# EAGLE board CT_schematic (EAGLE 7.6.0)

Size 100 x 80 mm. Coordinates in mm from the lower left corner, seen from the top.
Outline: 0,0 100,0 100,80 0,80 0,0
Copper layers (1*16): Top 0.035mm / dielectric 1.5mm / Bottom 0.035mm
Design rules "default": minimum track width 10mil, minimum drill 24mil, track to track 8mil, track to pad 8mil, pad to pad 8mil, via to via 8mil, smd to smd 8mil, copper to edge 40mil, drill to drill 8mil, minimum pad ring 10mil, minimum via ring 8mil, stop-mask expansion 4mil, vias tented up to drill 0mil, thermal gap 10mil

## Footprints (pad centres in the part's own frame; a part is rotated, then mirrored left to right if it is on the bottom)
C0603 = smd 0.8 x 0.8: 1 -0.762,0; 2 0.762,0
C0402 = smd 0.5 x 0.5: 1 -0.508,0; 2 0.508,0
C0805 = smd 1.2 x 1.3: 1 -1.016,0; 2 1.016,0
C1206 = smd 1.3 x 1.6: 1 -1.524,0; 2 1.524,0
DR1040 = smd 1.6 x 3.2: 1 -4.458,0; 2 4.458,0
R0603 = smd 0.8 x 0.8: 1 -0.762,0; 2 0.762,0
LQFP144 = smd 0.35 x 1.35: 1 -8.75,-10.625; 2 -8.25,-10.625; 3 -7.75,-10.625; 4 -7.25,-10.625; 5 -6.75,-10.625; 6 -6.25,-10.625; 7 -5.75,-10.625; 8 -5.25,-10.625; 9 -4.75,-10.625; 10 -4.25,-10.625; 11 -3.75,-10.625; 12 -3.25,-10.625; 13 -2.75,-10.62; 14 -2.25,-10.625; 15 -1.75,-10.625; 16 -1.25,-10.625; 17 -0.75,-10.625; 18 -0.25,-10.625; 19 0.25,-10.625; 20 0.75,-10.625; 21 1.25,-10.625; 22 1.75,-10.625; 23 2.25,-10.625; 24 2.75,-10.62; 25 3.25,-10.625; 26 3.75,-10.625; 27 4.25,-10.625; 28 4.75,-10.625; 29 5.25,-10.625; 30 5.75,-10.625; 31 6.25,-10.625; 32 6.75,-10.625; 33 7.25,-10.625; 34 7.75,-10.625; 35 8.25,-10.625; 36 8.75,-10.625; 73 8.75,10.625; 74 8.25,10.625; 75 7.75,10.625; 76 7.25,10.625; 77 6.75,10.625; 78 6.25,10.625; 79 5.75,10.625; 80 5.25,10.625; 81 4.75,10.625; 82 4.25,10.625; 83 3.75,10.625; 84 3.25,10.625; 85 2.75,10.625; 86 2.25,10.625; 87 1.75,10.625; 88 1.25,10.625; 89 0.75,10.625; 90 0.25,10.625; 91 -0.25,10.625; 92 -0.75,10.625; 93 -1.25,10.625; 94 -1.75,10.625; 95 -2.25,10.625; 96 -2.75,10.625; 97 -3.25,10.625; 98 -3.75,10.625; 99 -4.25,10.625; 100 -4.75,10.625; 101 -5.25,10.625; 102 -5.75,10.625; 103 -6.25,10.625; 104 -6.75,10.625; 105 -7.25,10.625; 106 -7.75,10.625; 107 -8.25,10.625; 108 -8.75,10.625 | smd 1.35 x 0.35: 37 10.625,-8.75; 38 10.625,-8.25; 39 10.625,-7.75; 40 10.625,-7.25; 41 10.625,-6.75; 42 10.625,-6.25; 43 10.625,-5.75; 44 10.625,-5.25; 45 10.625,-4.75; 46 10.625,-4.25; 47 10.625,-3.75; 48 10.625,-3.25; 49 10.625,-2.75; 50 10.625,-2.25; 51 10.625,-1.75; 52 10.625,-1.25; 53 10.625,-0.75; 54 10.625,-0.25; 55 10.625,0.25; 56 10.625,0.75; 57 10.625,1.25; 58 10.625,1.75; 59 10.625,2.25; 60 10.625,2.75; 61 10.625,3.25; 62 10.625,3.75; 63 10.625,4.25; 64 10.625,4.75; 65 10.625,5.25; 66 10.625,5.75; 67 10.625,6.25; 68 10.625,6.75; 69 10.625,7.25; 70 10.625,7.75; 71 10.625,8.25; 72 10.625,8.75; 109 -10.625,8.75; 110 -10.625,8.25; 111 -10.625,7.75; 112 -10.625,7.25; 113 -10.625,6.75; 114 -10.625,6.25; 115 -10.625,5.75; 116 -10.625,5.25; 117 -10.625,4.75; 118 -10.625,4.25; 119 -10.625,3.75; 120 -10.625,3.25; 121 -10.625,2.75; 122 -10.625,2.25; 123 -10.625,1.75; 124 -10.625,1.25; 125 -10.625,0.75; 126 -10.625,0.25; 127 -10.625,-0.25; 128 -10.625,-0.75; 129 -10.625,-1.25; 130 -10.625,-1.75; 131 -10.625,-2.25; 132 -10.625,-2.75; 133 -10.625,-3.25; 134 -10.625,-3.75; 135 -10.625,-4.25; 136 -10.625,-4.75; 137 -10.625,-5.25; 138 -10.625,-5.75; 139 -10.625,-6.25; 140 -10.625,-6.75; 141 -10.625,-7.25; 142 -10.625,-7.75; 143 -10.625,-8.25; 144 -10.625,-8.75
LGA-14 = smd 0.675 x 0.25: 1 -1.262,0.75; 2 -1.262,0.25; 3 -1.262,-0.25; 4 -1.262,-0.75; 8 1.262,-0.75; 9 1.262,-0.25; 10 1.262,0.25; 11 1.262,0.75 | smd 0.25 x 0.675: 5 -0.5,-1.012; 6 0,-1.012; 7 0.5,-1.012; 12 0.5,1.012; 13 0,1.012; 14 -0.5,1.012
TST-110-05-T-D-RA = drill 1 pad 1.7 square: 1 0,0 | drill 1 pad 1.7: 2 0,2.54; 3 2.54,0; 4 2.54,2.54; 5 5.08,0; 6 5.08,2.54; 7 7.62,0; 8 7.62,2.54; 9 10.16,0; 10 10.16,2.54; 11 12.7,0; 12 12.7,2.54; 13 15.24,0; 14 15.24,2.54; 15 17.78,0; 16 17.78,2.54; 17 20.32,0; 18 20.32,2.54; 19 22.86,0; 20 22.86,2.54
DFN8-S = smd 0.6 x 0.4: 1 -2.69,1.905; 2 -2.69,0.635; 3 -2.69,-0.635; 4 -2.69,-1.905; 5 2.69,-1.905; 6 2.69,-0.635; 7 2.69,0.635; 8 2.69,1.905
FCI_10118193-0001LF = smd 0.4 x 1.35: 1 -1.3,2.675; 2 -0.65,2.675; 3 0,2.675; 4 0.65,2.675; 5 1.3,2.675 | smd 1.6 x 1.4: 6 -3.2,2.45; 7 3.2,2.45 | smd 1.9 x 1.9: 8 -1.2,0; 9 1.2,0 | hole 0.5: -3.3,0; 3.3,0
SOT143B = smd 1 x 0.7: 1 -0.75,-1 | smd 0.6 x 0.7: 2 0.95,-1; 3 0.95,1; 4 -0.95,1
ASEK = smd 1.4 x 1: 1 -1.1,-0.8; 2 1.1,-0.8; 3 1.1,0.8; 4 -1.1,0.8
ASFL1 = smd 1.7 x 1.5: 1 -1.27,-1.1; 2 1.27,-1.1; 3 1.27,1.1; 4 -1.27,1.1
TSOT-23-5 = smd 1.3 x 0.62: 1 -1.31,0.95; 2 -1.31,0; 3 -1.31,-0.95; 4 1.31,-0.95; 5 1.31,0.95
DFN8_2X3MC = smd 0.813 x 0.305: 1 -1.398,0.75; 2 -1.398,0.25; 3 -1.398,-0.25; 4 -1.398,-0.75; 5 1.398,-0.75; 6 1.398,-0.25; 7 1.398,0.25; 8 1.398,0.75 | smd 1.753 x 1.549: 9 0,0
JST-2-SMD = smd 1 x 4.6: 1 -1,-3.7; 2 1,-3.7 | smd 1.6 x 3.4: NC1 -3.4,1.5; NC2 3.4,1.5
SON-6 = smd 0.55 x 0.3: 1 -0.355,0.5 | smd 0.52 x 0.3: 2 -0.37,0; 3 -0.37,-0.5; 4 0.37,-0.5; 5 0.37,0; 6 0.37,0.5
SW_4-1437565-2 = smd 1.4 x 2.1: 1 -2.23,4.55; 2 -2.23,-4.55; 3 2.23,4.55; 4 2.23,-4.55
LGM67K-G1J2-24-Z = smd 0.8 x 1.4: A -2,0; C 0,0
NC7SZ125M5X = smd 1.3 x 0.7: 1 -1.3,0.95; 2 -1.3,0; 3 -1.3,-0.95; 4 1.3,-0.95; 5 1.3,0.95
DUMMY_PACKAGE_165 = drill 0.3: 1 0,-1; 2 1.5,-1; 3 3,-1

## Placement (x,y rotation side)
C1  1e-07  [C0603]  -58.42,57.15 0 top  (outside the outline)
C2  1e-07  [C0603]  -62.23,57.15 0 top  (outside the outline)
C3  1e-07  [C0603]  -66.04,57.15 0 top  (outside the outline)
C4  1e-07  [C0603]  -15.24,62.23 0 top  (outside the outline)
C5  1e-07  [C0603]  -19.05,62.23 0 top  (outside the outline)
C6  1e-07  [C0603]  -22.86,62.23 0 top  (outside the outline)
C7  1e-07  [C0603]  -26.67,62.23 0 top  (outside the outline)
C8  1e-07  [C0603]  -30.48,62.23 0 top  (outside the outline)
C9  1e-07  [C0603]  -34.29,62.23 0 top  (outside the outline)
C10  1e-07  [C0603]  -38.1,62.23 0 top  (outside the outline)
C11  1e-07  [C0603]  -41.91,62.23 0 top  (outside the outline)
C12  4.7e-06  [C0603]  -54.61,57.15 0 top  (outside the outline)
C13  1e-07  [C0603]  -45.72,62.23 0 top  (outside the outline)
C14  1e-08  [C0603]  -49.53,62.23 0 top  (outside the outline)
C15  1e-06  [C0603]  -53.34,62.23 0 top  (outside the outline)
C16  1e-07  [C0402]  -30.48,67.31 0 top  (outside the outline)
C17  1e-07  [C0402]  -34.29,67.31 0 top  (outside the outline)
C18  1e-07  [C0402]  -38.1,67.31 0 top  (outside the outline)
C19  1e-07  [C0402]  -41.91,67.31 0 top  (outside the outline)
C20  1e-08  [C0402]  -45.72,67.31 0 top  (outside the outline)
C21  1e-08  [C0402]  -49.53,67.31 0 top  (outside the outline)
C22  1e-08  [C0402]  -53.34,67.31 0 top  (outside the outline)
C23  1e-05  [C0805]  -60.96,44.45 0 top  (outside the outline)
C24  1e-05  [C0805]  -66.04,44.45 0 top  (outside the outline)
C25  1e-07  [C0402]  -57.15,67.31 0 top  (outside the outline)
C26  1e-05  [C1206]  -36.83,44.45 0 top  (outside the outline)
C27  1e-05  [C1206]  -43.18,44.45 0 top  (outside the outline)
C28  1e-08  [C0402]  -60.96,67.31 0 top  (outside the outline)
C29  1e-08  [C0402]  -64.77,67.31 0 top  (outside the outline)
I1  3.8e-06  [DR1040]  -60.96,6.35 0 top  (outside the outline)
R2  1000.0  [R0603]  -57.15,62.23 0 top  (outside the outline)
R4  4700.0  [R0603]  -60.96,62.23 0 top  (outside the outline)
R5  2200.0  [R0603]  -64.77,62.23 0 top  (outside the outline)
R6  2200.0  [R0603]  -68.58,62.23 0 top  (outside the outline)
R7  2200.0  [R0603]  -15.24,67.31 0 top  (outside the outline)
R8  2200.0  [R0603]  -19.05,67.31 0 top  (outside the outline)
R9  10000.0  [R0603]  -43.18,52.07 0 top  (outside the outline)
R10  10000.0  [R0603]  -48.26,52.07 0 top  (outside the outline)
R11  10000.0  [R0603]  -53.34,52.07 0 top  (outside the outline)
R12  10000.0  [R0603]  -58.42,52.07 0 top  (outside the outline)
R13  10000.0  [R0603]  -63.5,52.07 0 top  (outside the outline)
R14  10000.0  [R0603]  -68.58,52.07 0 top  (outside the outline)
R15  10000.0  [R0603]  -15.24,57.15 0 top  (outside the outline)
R16  10000.0  [R0603]  -20.32,57.15 0 top  (outside the outline)
R17  10000.0  [R0603]  -25.4,57.15 0 top  (outside the outline)
R18  10000.0  [R0603]  -30.48,57.15 0 top  (outside the outline)
R19  10000.0  [R0603]  -35.56,57.15 0 top  (outside the outline)
R20  220000.0  [R0603]  -27.94,52.07 0 top  (outside the outline)
R21  1000000.0  [R0603]  -22.86,52.07 0 top  (outside the outline)
R22  10000.0  [R0603]  -40.64,57.15 0 top  (outside the outline)
R23  10000.0  [R0603]  -45.72,57.15 0 top  (outside the outline)
R24  9100.0  [R0603]  -22.86,67.31 0 top  (outside the outline)
R25  680000.0  [R0603]  -33.02,52.07 0 top  (outside the outline)
R26  120000.0  [R0603]  -38.1,52.07 0 top  (outside the outline)
R27  2000.0  [R0603]  -26.67,67.31 0 top  (outside the outline)
R28  10000.0  [R0603]  -50.8,57.15 0 top  (outside the outline)
U1  STM32L162ZET6  [LQFP144]  -24.13,11.43 0 top  (outside the outline)
U2  BMG250  [LGA-14]  -17.78,45.72 0 top  (outside the outline)
U3  TST-110-05-T-D-RA  [TST-110-05-T-D-RA]  -46.99,35.56 0 top  (outside the outline)
U4  24AA512-I/MF  [DFN8-S]  -38.1,27.94 0 top  (outside the outline)
U5  10118193-0001LF  [FCI_10118193-0001LF]  -63.5,26.67 0 top  (outside the outline)
U6  prtr5v0u2ax  [SOT143B]  -24.13,72.39 0 top  (outside the outline)
U7  ASEK-32.768KHz-ECST  [ASEK]  -66.04,38.1 0 top  (outside the outline)
U8  ASFL1-25MHZ-NCS  [ASFL1]  -54.61,27.94 0 top  (outside the outline)
U9  ltc3406es5  [TSOT-23-5]  -15.24,50.8 0 top  (outside the outline)
U10  MCP73831T-2ACI/MC  [DFN8_2X3MC]  -39.37,71.12 0 top  (outside the outline)
U11  S2B-PH-SM4-TB(LF)(SN)  [JST-2-SMD]  -22.86,29.21 0 top  (outside the outline)
U12  TPS3895ADRYR  [SON-6]  -33.02,71.12 0 top  (outside the outline)
U13  4-1437565-2  [SW_4-1437565-2]  -50.8,6.35 0 top  (outside the outline)
U14  Q65110A2395  [LGM67K-G1J2-24-Z]  -25.4,45.72 0 top  (outside the outline)
U15  nc7sz125m5x  [NC7SZ125M5X]  -48.26,44.45 0 top  (outside the outline)
U16  nc7sz125m5x  [NC7SZ125M5X]  -54.61,44.45 0 top  (outside the outline)
U17  Dummy  [DUMMY_PACKAGE_165]  -30.48,72.39 0 top  (outside the outline)

## Library data of the parts
C1-C29 I1 R2 R4-R28 U1-U17 = circuit_tree

## Nets
CLK_U1_8: U1.8 U7.3
CLK_U1_23: U1.23 U8.3
GND: C1.2 C2.2 C3.2 C4.2 C5.2 C6.2 C7.2 C8.2 C9.2 C10.2 C11.2 C12.2 C13.2 C14.2 C15.2 C16.2 C17.2 C18.2 C19.2 C20.2 C21.2 C22.2 C23.2 C24.1 C24.2 C25.2 C26.2 C27.2 C28.2 C29.2 R2.2 R9.2 R16.2 R20.2 R24.2 R26.2 R27.2 U1.16 U1.30 U1.31 U1.38 U1.51 U1.61 U1.71 U1.83 U1.94 U1.107 U1.120 U1.130 U1.143 U2.1 U2.6 U2.7 U3.4 U3.6 U3.8 U3.10 U3.12 U3.14 U3.16 U3.18 U3.20 U4.4 U4.7 U5.5 U5.6 U5.7 U5.8 U5.9 U6.1 U7.2 U8.2 U9.2 U10.6 U10.9 U11.2 U12.2 U14.C U15.2 U15.3 U16.1 U16.3 U17.1
INPUT_USBPOWER_5V: C26.1 R28.2 U5.1 U6.4 U10.1 U10.2
NET_U1_6: C13.1 U1.6
NET_U1_25: R4.1 U1.25 U16.4
NET_U1_33: U1.32 U1.33
NET_U1_69: R7.1 U1.69 U4.6
NET_U1_70: R8.1 U1.70 U4.5
NET_U1_136: R5.1 U1.136 U2.13
NET_U1_137: R6.1 U1.137 U2.14
NET_U1_138: R9.1 U1.138
NET_U1_141: U14.A
NET_U1_142: U13.3 U13.4
NET_U2_12: R10.1 U2.12
NET_U3_19: R16.1 U3.19
NET_U4_1: R17.1 U4.1
NET_U4_2: R18.1 U4.2
NET_U4_3: R19.1 U4.3
NET_U9_1: U9.1
NET_U9_3: I1.1 U9.3
NET_U9_5: R20.1 R21.1 U9.5
NET_U9_ATNET_3: I1.2 R21.2
NET_U10_5: R28.1 U10.5
NET_U10_8: R27.1 U10.8
NET_U12_1: R23.1 R24.1 U12.1
NET_U12_3: R25.2 R26.1 U12.3
NET_U12_4: R22.1 U12.4 U15.4 U16.2
NET_U13_1: R2.1 U13.1 U13.2
PROC_ADC_IN2B: U1.50 U17.2
PROC_ADC_IN20: U1.75 U17.3
PROC_GPIO_TO_U2_INT1: U1.1 U2.4
PROC_SYS_JTCK_SWCLK: R14.1 U1.109 U3.9
PROC_SYS_JTDI: R12.1 U1.110 U3.5
PROC_SYS_JTDO_TRACESWO: U1.133 U3.13
PROC_SYS_JTMS_SWDIO: R13.1 U1.105 U3.7
PROC_SYS_JTRST: R11.1 U1.134 U3.3
PROC_USB_DM: U1.103 U5.2 U6.3
PROC_USB_DP: U1.104 U5.3 U6.2
RST_OUT_U3_SRESET_B: R15.1 U3.15 U15.1
VCC_S1_3V7: C23.1 C27.1 U9.4 U10.3 U10.4 U11.1
VCC_TIER1_3V3: C1.1 C2.1 C3.1 C4.1 C5.1 C6.1 C7.1 C8.1 C9.1 C10.1 C11.1 C12.1 C14.1 C15.1 C16.1 C17.1 C18.1 C19.1 C20.1 C21.1 C22.1 C24.2 C25.1 C28.1 C29.1 I1.2 R4.2 R5.2 R6.2 R7.2 R8.2 R10.2 R11.2 R12.2 R13.2 R14.2 R15.2 R17.2 R18.2 R19.2 R21.2 R22.2 R23.2 R25.1 U1.17 U1.33 U1.39 U1.52 U1.62 U1.72 U1.84 U1.95 U1.108 U1.121 U1.131 U1.144 U2.5 U2.8 U3.1 U3.2 U4.8 U7.4 U8.4 U12.6 U15.5 U16.5

## Tracks (layer width: path | path; a pad name or v marks a point on that pad's centre or on a via)
CLK_U1_8  (1 unrouted)
CLK_U1_23  (1 unrouted)
GND  (82 unrouted)
INPUT_USBPOWER_5V  (5 unrouted)
NET_U1_6  (1 unrouted)
NET_U1_25  (2 unrouted)
NET_U1_33  (1 unrouted)
NET_U1_69  (2 unrouted)
NET_U1_70  (2 unrouted)
NET_U1_136  (2 unrouted)
NET_U1_137  (2 unrouted)
NET_U1_138  (1 unrouted)
NET_U1_142  (1 unrouted)
NET_U2_12  (1 unrouted)
NET_U3_19  (1 unrouted)
NET_U4_1  (1 unrouted)
NET_U4_2  (1 unrouted)
NET_U4_3  (1 unrouted)
NET_U9_3  (1 unrouted)
NET_U9_5  (2 unrouted)
NET_U9_ATNET_3  (1 unrouted)
NET_U10_5  (1 unrouted)
NET_U10_8  (1 unrouted)
NET_U12_1  (2 unrouted)
NET_U12_3  (2 unrouted)
NET_U12_4  (3 unrouted)
NET_U13_1  (2 unrouted)
PROC_ADC_IN2B  (1 unrouted)
PROC_ADC_IN20  (1 unrouted)
PROC_GPIO_TO_U2_INT1  (1 unrouted)
PROC_SYS_JTCK_SWCLK  (2 unrouted)
PROC_SYS_JTDI  (2 unrouted)
PROC_SYS_JTDO_TRACESWO  (1 unrouted)
PROC_SYS_JTMS_SWDIO  (2 unrouted)
PROC_SYS_JTRST  (2 unrouted)
PROC_USB_DM  (2 unrouted)
PROC_USB_DP  (2 unrouted)
RST_OUT_U3_SRESET_B  (2 unrouted)
VCC_S1_3V7  (5 unrouted)
VCC_TIER1_3V3  (65 unrouted)